# Altium PCB UV-LED.PcbDoc
Units mm, origin at the board's own origin, x right, y up, seen from the top; angles counter-clockwise.
Board outline 47.62 x 45.47 mm, 2 copper layers (Top Layer, Bottom Layer); 16 components, 11 nets, 47 pads, 0 vias.
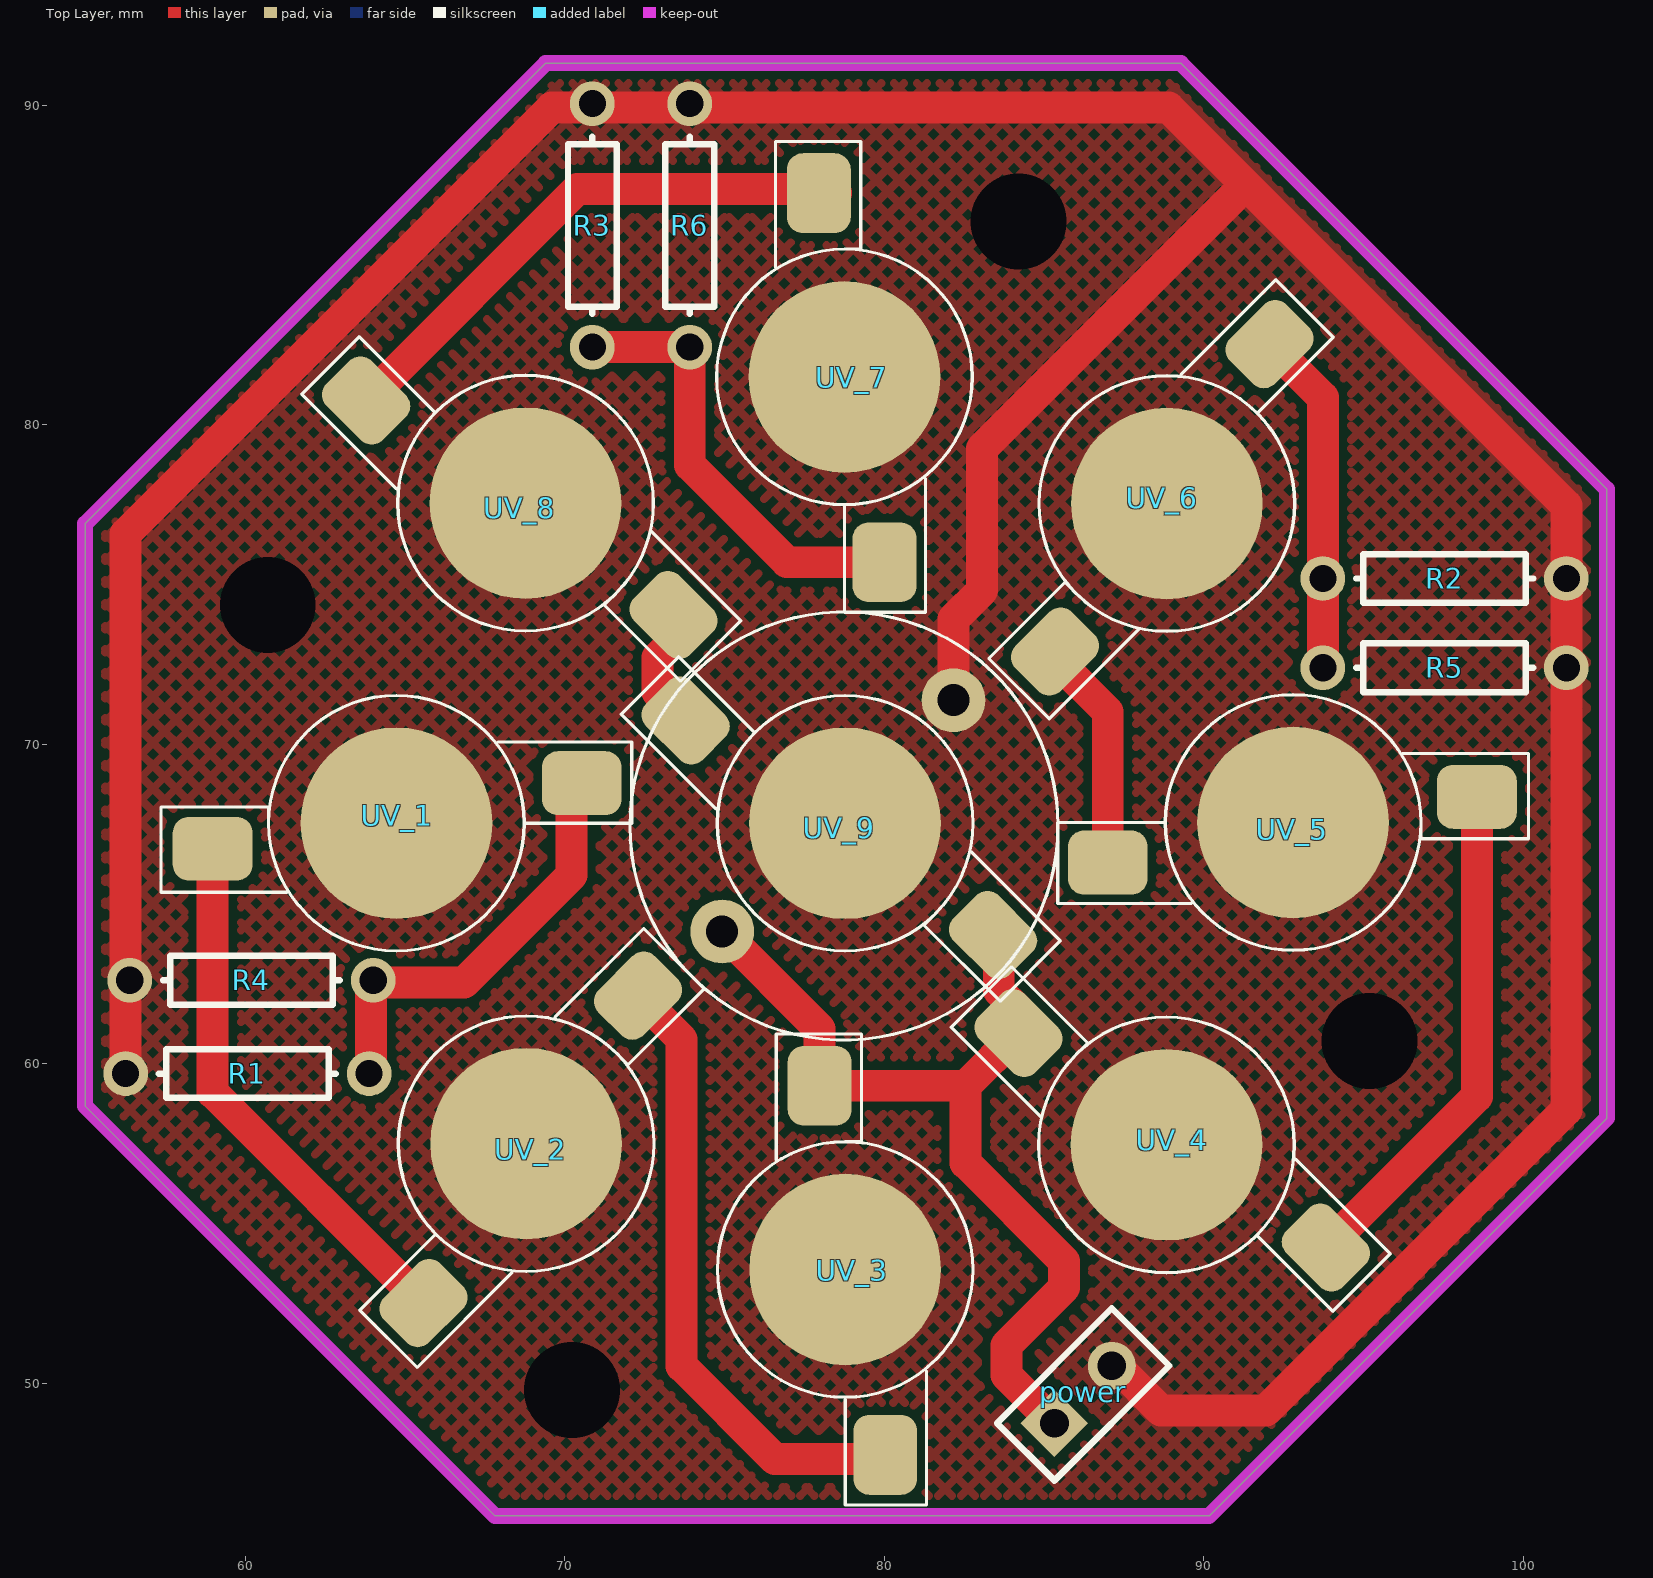
[diagram p0: Top Layer view]
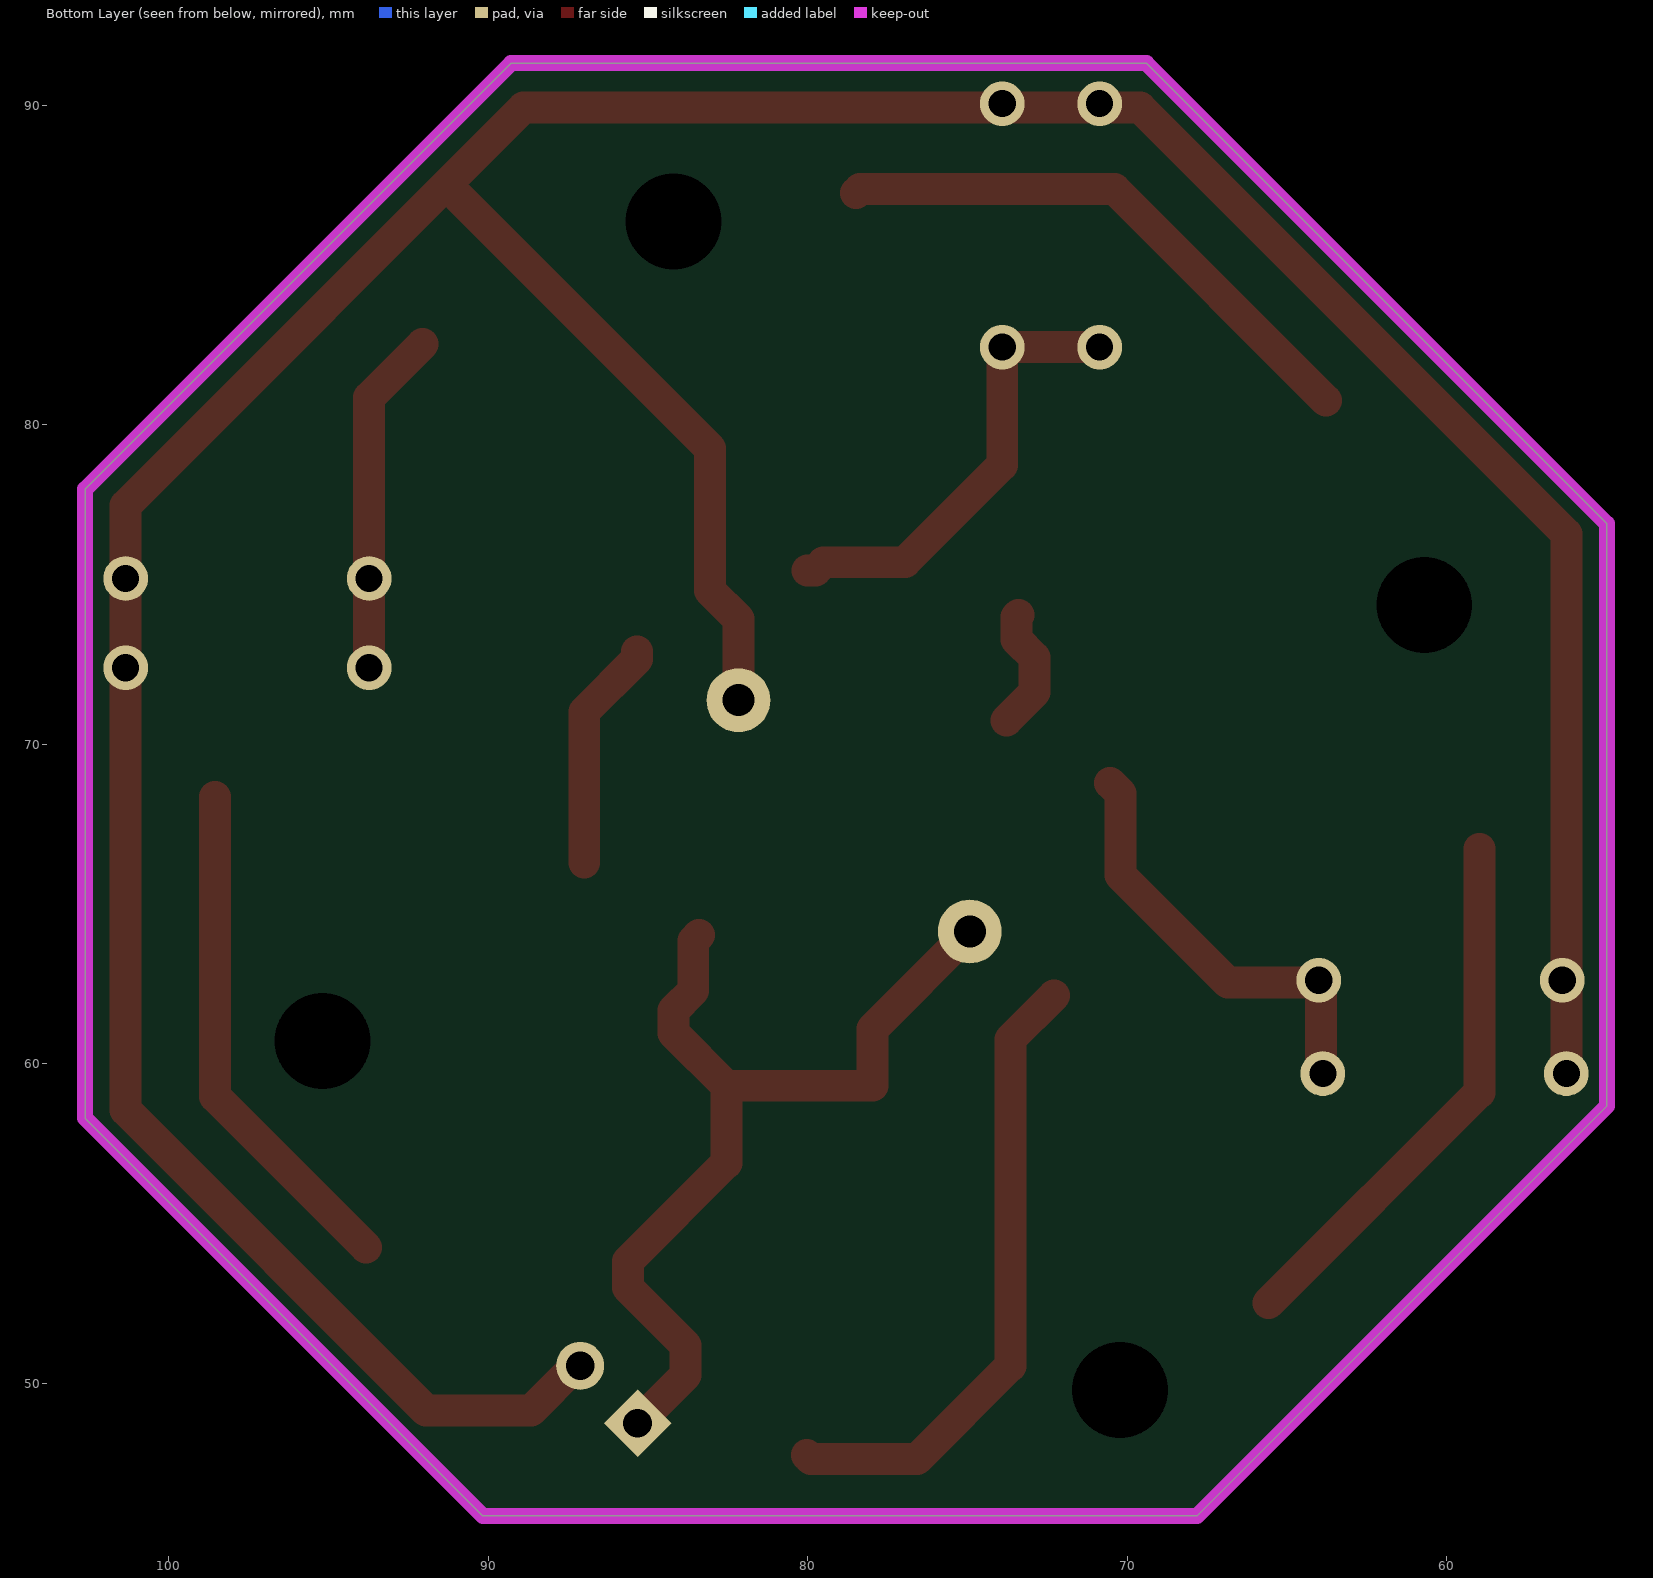
[diagram p1: Bottom Layer view, seen from below]
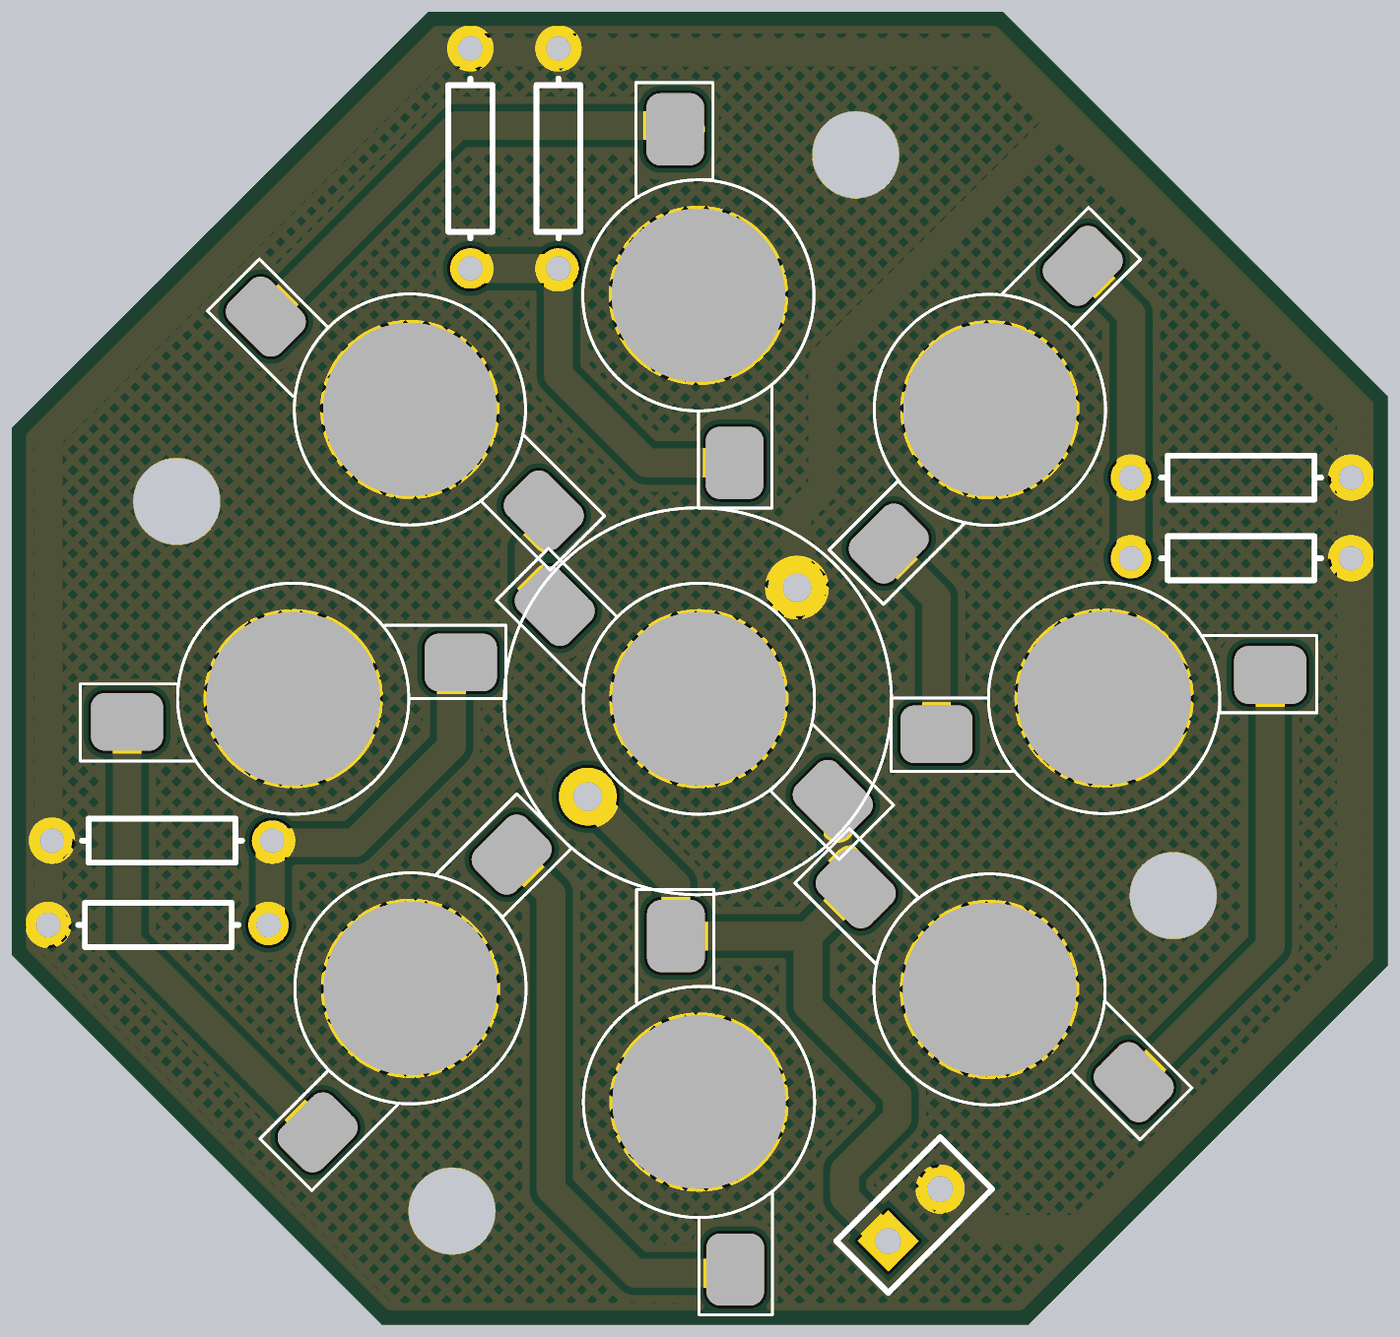
[diagram p2: 3D render of the assembled board from above, using the file's embedded part models]

## Layer stack, top to bottom
Top Solder: solder mask 0.0102, Solder Resist, Dk 3.5
Top Layer: signal copper 0.0356
Dielectric 1: dielectric 0.32, FR-4, Dk 4.8
Bottom Layer: signal copper 0.0356
Bottom Solder: solder mask 0.0102, Solder Resist, Dk 3.5

## Board outline
54.991,58.674 67.818,45.847 90.17,45.847 102.616,58.293 102.616,77.978 89.281,91.313 69.406,91.313 54.991,76.898

## Design rules (kind name [scope] priority, off if disabled: settings)
Clearance [All] p1: gap=0.254 ignorepadtopadclearanceinfootprint=FALSE except(0: Arc-Hole Track-Hole SMDPad-Hole THPad-Hole Via-Hole Fill-Hole Poly-Hole Region-Hole Text-Hole)
PolygonConnect [All] p1: thpad.connectstyle=Direct thpad.reliefconductorwidth=0.254 thpad.reliefentries=4 thpad.polygonreliefangle="45 Angle" thpad.airgapwidth=1 smdpad.connectstyle=Direct smdpad.reliefconductorwidth=0.254 smdpad.reliefentries=4 smdpad.polygonreliefangle="90 Angle" smdpad.airgapwidth=0.254 via.connectstyle=Relief via.reliefconductorwidth=0.254 via.reliefentries=4 via.polygonreliefangle="90 Angle" via.airgapwidth=0.254
RoutingVias [All] p1: holewidth=0.711 width=1.27 viastyle="Through Hole" minholewidth=0.711 minwidth=1.27 maxholewidth=0.711 maxwidth=1.27
SolderMaskExpansion [All] p1: expansion=0.102
Width [All] p1: maxlimit=1 minlimit=0.254 preferedwidth=0.5 minimp=50.000000 maximp=50.000000 favimp=50.000000
30 further rules are at their usual default settings.

## Components (designator, comment, footprint, x,y, rotation, side; value= is the part's Value field where it differs from the comment)
power "Header 2" HDR1X2 85.326,48.75 r45 top
R1 "Res1" AXIAL-0.3 60.071,59.69 r0 top value=150
R2 "Res1" AXIAL-0.3 97.536,75.184 r180 top value=150
R3 "Res1" AXIAL-0.3 70.866,86.233 r270 top value=150
R4 "Res1" AXIAL-0.3 60.198,62.611 r0 top value=10
R5 "Res1" AXIAL-0.3 97.536,72.39 r180 top value=10
R6 "Res1" AXIAL-0.3 73.914,86.233 r270 top value=10
UV_1 "1-5W-LED" Highpwr_SMT_LED 64.735,67.526 r180 top
UV_2 "1-5W-LED" Highpwr_SMT_LED 68.794,57.496 r45 top
UV_3 "1-5W-LED" Highpwr_SMT_LED 78.778,53.559 r90 top
UV_4 "1-5W-LED" Highpwr_SMT_LED 88.833,57.46 r135 top
UV_5 "1-5W-LED" Highpwr_SMT_LED 92.795,67.548 r0 top
UV_6 "1-5W-LED" Highpwr_SMT_LED 88.844,77.53 r225 top
UV_7 "1-5W-LED" Highpwr_SMT_LED 78.756,81.492 r90 top
UV_8 "1-5W-LED" Highpwr_SMT_LED 68.774,77.541 r315 top
UV_9 "1-5W-LED" Highpwr_SMT_LED 78.775,67.524 r315 top

## Footprints (in the part's own frame and the unit in brackets; to place one, negate y for a bottom-side part, rotate by r counter-clockwise, add the part's x,y. Pads: shape width x height; smd on the part's side, far side on the other; paste and mask are expansions set on the pad)
AXIAL-0.3 [mm] "Axial Device, Thru-Hole; 2 Leads; 0.3 in Pin Spacing"
  round 1.4 hole 0.85: 1(-3.81,0) 2(3.81,0)
  silkscreen extent -2.77,-0.76 2.77,0.76
HDR1X2 [mm] "Connector; Header; 2 Position"
  rect 1.5x1.5 hole 0.9: 1(0,0)
  round 1.5 hole 0.9: 2(2.54,0)
  silkscreen extent -1.27,-1.27 3.81,1.27
Highpwr_SMT_LED [mm]
  round 6 smd: 0(0,0)
  rrect50% 2.5x2 smd: 1(-5.8,-1.254) 2(5.75,0.8)
  silkscreen extent -7.37,-4 7.37,4, body extent -6.8,-3.7 6.8,3.7, height 4.4

## Part data
power: "Header, 2-Pin", LatestRevisionDate=17-Jul-2002, LatestRevisionNote="Re-released for DXP Platform.", Publisher="Altium Limited"
R1 R2 R3 R4 R5 R6: "Resistor", LatestRevisionDate=17-Jul-2002, LatestRevisionNote="Re-released for DXP Platform.", PackageDescription="Axial Device, Thru-Hole; 2 Leads; 0.3 in Pin Spacing", PackageReference=AXIAL-0.3, Published=8-Jun-2000, Publisher="Altium Limited"

## Free pads (board coordinates)
  round 2 hole 1: GND(82.169,71.374) VCC(74.93,64.135)
  round 2 hole 3: ""(60.707,74.357) ""(70.231,49.784) ""(84.201,86.36) ""(95.191,60.707)

## Nets (pads, with @x,y where several pads share a name; then routed paths per layer and width w, separated by ;. In a path a pad name is that pad's centre, name@x,y a point inside that pad or via, vN(x,y) a via of type N, cw(c..) or ccw(c..) an arc to the next point about the centre after c; other vN are vias at no path point)
GND: pad. pad.GND power.2 R1.1 R2.1 R3.1 R4.1 R5.1 R6.1 UV_1.0 UV_2.0 UV_3.0 UV_4.0 UV_5.0 UV_6.0 UV_7.0 UV_8.0 UV_9.0 | length 129.7
  Top Layer w1: R1.1 56.261,76.581 69.596,89.916 88.9,89.916 101.346,77.47 R2.1 R5.1 101.346,58.547 91.948,49.149 88.654,49.149 87.257,50.546 power.2 ; pad.GND 82.169,73.914 83.058,74.803 83.058,79.248 90.932,87.122
NetR1_2: R1.2 R4.2 UV_1.1 | length 13.6
  Top Layer w1: R1.2 63.944,59.753 63.944,62.547 R4.2 64.085,62.534 66.852,62.534 70.217,65.899 70.217,68.462 UV_1.1
NetR2_2: R2.2 R5.2 UV_6.1 | length 10.8
  Top Layer w1: UV_6.1 93.726,80.85 R2.2 R5.2
NetR3_2: R3.2 R6.2 UV_7.1 | length 14.2
  Top Layer w1: R3.2 R6.2 73.914,78.74 76.962,75.692 79.502,75.692 79.756,75.438 UV_7.1@80.01,75.438
NetUV_1_2: UV_1.2 UV_2.1 | length 16.9
  Top Layer w1: UV_1.2 58.985,59.103 UV_2.1
NetUV_2_2: UV_2.2 UV_3.1 | length 19.8
  Top Layer w1: UV_2.2 73.66,60.762 73.66,50.546 76.581,47.625 79.898,47.625 UV_3.1
NetUV_4_1: UV_4.1 UV_5.2 | length 16.1
  Top Layer w1: UV_4.1 98.545,58.97 UV_5.2
NetUV_5_1: UV_5.1 UV_6.2 | length 7.3
  Top Layer w1: UV_6.2 85.344,72.664 86.995,71.013 UV_5.1
NetUV_7_2: UV_7.2 UV_8.1 | length 17.5
  Top Layer w1: UV_8.1 70.407,87.376 78.359,87.376 UV_7.2@78.486,87.249
NetUV_8_2: UV_8.2 UV_9.1 | length 3.9
  Top Layer w1: UV_8.2 73.467,73.98 73.467,73.273 72.898,72.705 72.898,71.628 UV_9.1
VCC: pad.VCC power.1 UV_3.2 UV_4.2 UV_9.2 | length 29.6
  Top Layer w1: pad.VCC 77.978,61.087 UV_3.2 82.55,59.309 ; UV_9.2 83.583,63.848 83.583,62.285 84.201,61.667 UV_4.2 82.55,59.309 ; power.1 83.82,50.256 83.82,51.181 85.628,52.989 85.628,53.818 82.55,56.896 82.55,59.309

## Polygon pours and split planes (outlines as drawn)
GND on Top Layer "thermal" (hatched 45Degree grid 0.508 track 0.254, remove dead copper, pour order 2): 54.991,76.898 69.406,91.313 89.281,91.313 102.616,77.978 102.616,58.293 90.17,45.847 67.818,45.847 54.991,58.674
no net on Top Layer "Top Layer-No Net" (solid, pour order 3): 61.976,73.66

## Keep-outs
Keep-Out Layer:
  the board outline again, w0.5

## Silkscreen, mask and mechanical layers (free items; w line width, h text height)
Top Overlay:
  circle w0.1: c78.74,67.437 r6.7